# EAGLE board SolarCell (EAGLE 9.6.2)
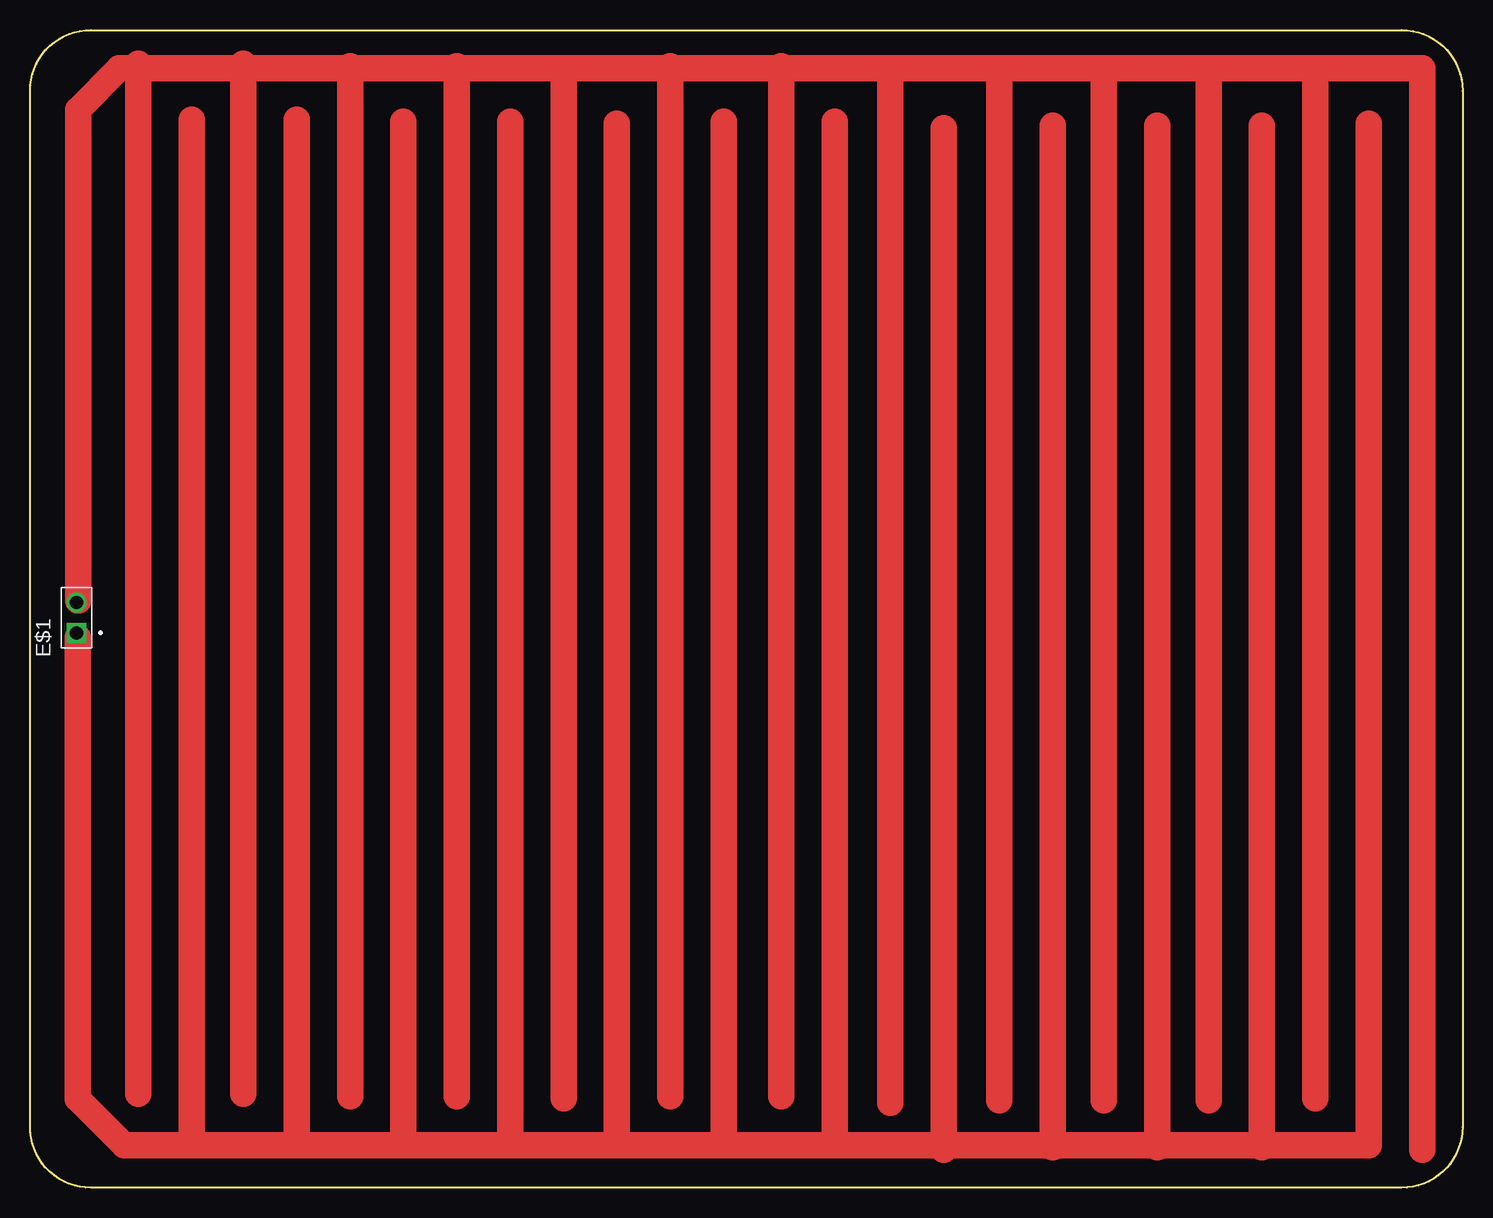
[diagram p0: board, top side]

Size 119.38 x 96.52 mm. Coordinates in mm from the lower left corner, seen from the top.
Outline: 114.3,0 5.08,0 arc-90 0,5.08 0,91.44 arc-90 5.08,96.52 114.3,96.52 arc-90 119.38,91.44 119.38,5.08 arc-90 114.3,0
Copper layers (1*16): Top 0.035mm / dielectric 1.5mm / Bottom 0.035mm
Design rules "default": minimum track width 6mil, minimum drill 0.35mm, track to track 6mil, track to pad 6mil, pad to pad 6mil, via to via 6mil, smd to smd 6mil, copper to edge 40mil, drill to drill 6mil, minimum pad ring 10mil, minimum via ring 8mil, stop-mask expansion 4mil, vias tented up to drill 0mil, thermal gap 10mil

## Footprints (pad centres in the part's own frame; a part is rotated, then mirrored left to right if it is on the bottom)
61300211121 = drill 1.1 square: 1 -1.27,0 | drill 1.1: 2 1.27,0

## Placement (x,y rotation side)
E$1  [61300211121]  3.88,47.52 90 top

## Library data of the parts
E$1 = Headers

## Tracks (layer width: path | path; a pad name or v marks a point on that pad's centre or on a via)
S$1
  Top 2.2: 107.11,93.33 116.01,93.33 116.01,3.18 | 107.11,93.33 7.45,93.33 4,89.89 4,48.97 | 107.11,93.33 107.11,7.46
S$2
  Top 2.2: 111.56,88.7 111.56,3.54 7.84,3.54 3.97,7.41 3.97,45.87
S$3
  Top 2.2: 98.21,93.16 98.21,7.28
S$8
  Top 2.2: 102.66,3.36 102.66,88.52
S$9
  Top 2.2: 89.49,93.16 89.49,7.28
S$10
  Top 2.2: 93.94,3.36 93.94,88.52
S$12
  Top 2.2: 80.77,93.16 80.77,7.28
S$13
  Top 2.2: 85.22,3.36 85.22,88.52
S$14
  Top 2.2: 71.69,92.98 71.69,7.1
S$15
  Top 2.2: 76.14,3.18 76.14,88.34
S$16
  Top 2.2: 62.62,93.51 62.62,7.64
S$17
  Top 2.2: 67.07,3.72 67.07,88.88
S$18
  Top 2.2: 53.36,93.51 53.36,7.64
S$19
  Top 2.2: 57.81,3.72 57.81,88.88
S$20
  Top 2.2: 44.47,93.33 44.47,7.46
S$21
  Top 2.2: 48.92,3.54 48.92,88.7
S$22
  Top 2.2: 35.57,93.51 35.57,7.64
S$23
  Top 2.2: 40.02,3.72 40.02,88.88
S$24
  Top 2.2: 26.67,93.51 26.67,7.64
S$25
  Top 2.2: 31.12,3.72 31.12,88.88
S$26
  Top 2.2: 17.77,93.69 17.77,7.82
S$27
  Top 2.2: 22.22,3.9 22.22,89.06
S$28
  Top 2.2: 9.02,93.69 9.02,7.82
S$29
  Top 2.2: 13.47,3.9 13.47,89.06